# Altium PCB 001-0002_beaglebone_cape_board.PcbDoc
Units mil, origin at the board's own origin, x right, y up, seen from the top; angles counter-clockwise.
Board outline 2155.03 x 2890.03 mil, 2 copper layers (Top Layer, Bottom Layer), stack 42.756 mil thick; 8 components, 7 nets, 117 pads, 0 vias.
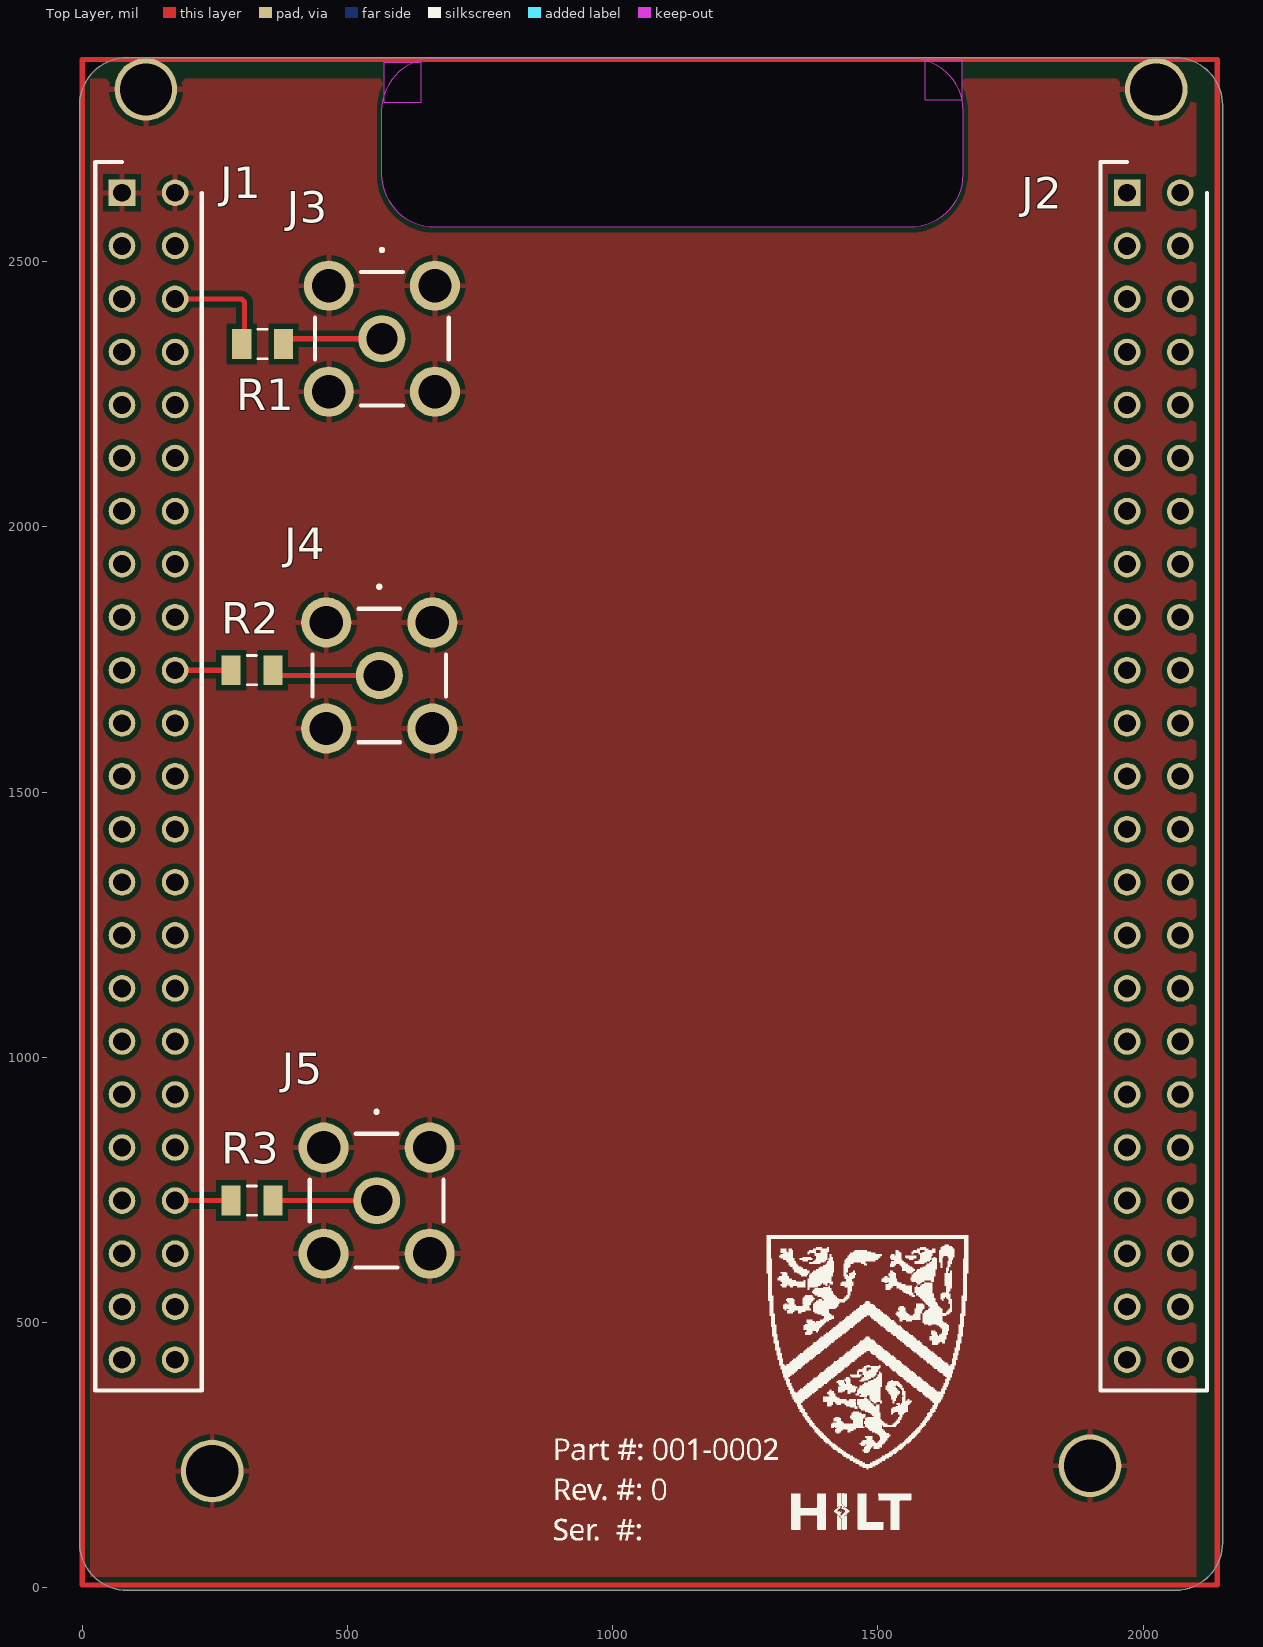
[diagram p0: Top Layer view]
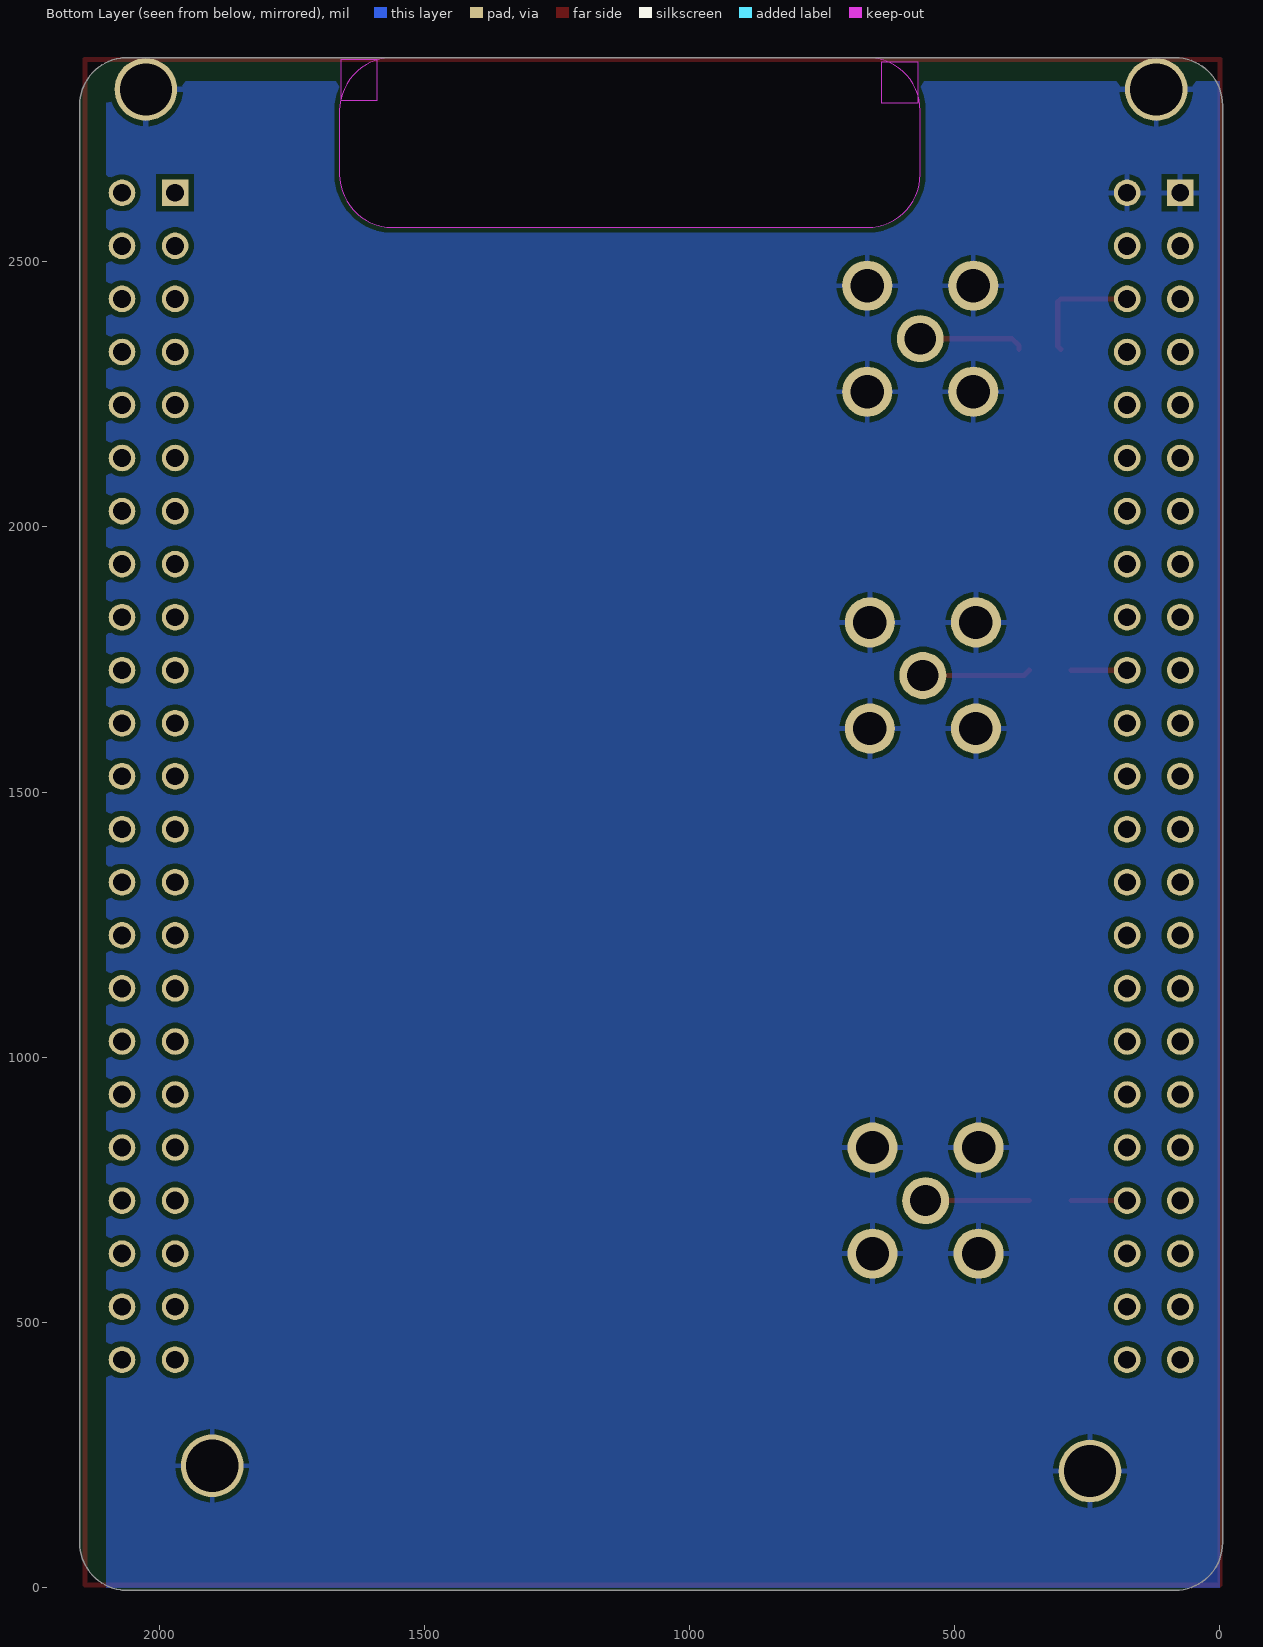
[diagram p1: Bottom Layer view, seen from below]
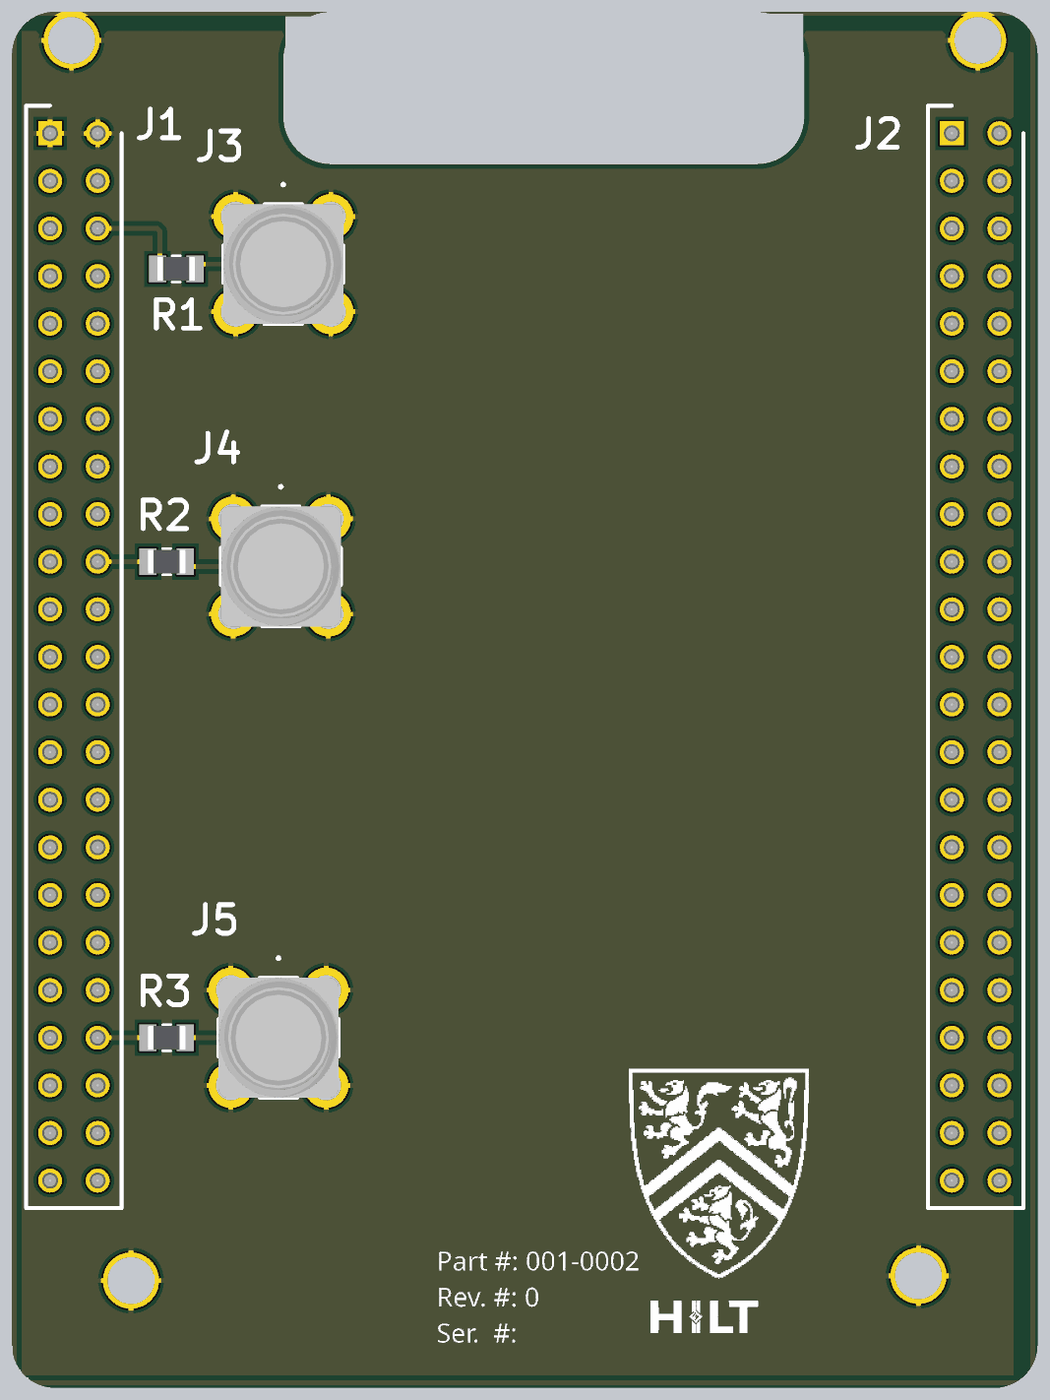
[diagram p2: 3D render of the assembled board from above, using the file's embedded part models]

## Layer stack, top to bottom
Top Solder: solder mask 0.4, Solder Resist, Dk 3.5
Top Layer: signal copper 1.378
Dielectric 1: dielectric 40, FR-4, Dk 4.8
Bottom Layer: signal copper 1.378
Bottom Solder: solder mask 0.4, Solder Resist, Dk 3.5

## Board outline
-5.02,85 ccw(c85,85) 85,-5.02 2070,-5.02 2072.91,-4.08 ccw(c2060,85) 2150.01,85 2150.01,90 2150.01,2794.95 2150.02,2795 ccw(c2060,2795) 2072.91,2884.08 2070,2885.01 85,2885.01 ccw(c85,2795) -5.01,2795
cut-out: 1589.17,2804.51 1589.17,2881.16 1658.08,2881.16 1658.08,2804.51
cut-out: 569.17,2799.51 569.17,2876.16 638.08,2876.16 638.08,2799.51
cut-out: 565,2665 565,2785 cw(c665,2785) 665,2885 1560,2885 cw(c1560,2785) 1660,2785 1660,2665 cw(c1560,2665) 1560,2565 665,2565 cw(c665,2665)

## Design rules (kind name [scope] priority, off if disabled: settings)
Clearance [All] p1: gap=10 ignorepadtopadclearanceinfootprint=FALSE except(5: Arc-Arc Arc-Track Track-Track)
PolygonConnect [All] p1: connectstyle=Relief reliefconductorwidth=10 reliefentries=4 polygonreliefangle="90 Angle" airgapwidth=10
RoutingVias [All] p1: holewidth=28 width=50 viastyle="Through Hole" minholewidth=28 minwidth=50 maxholewidth=28 maxwidth=50
SolderMaskExpansion [All] p1: expansion=4 istentingtop=FALSE
SupplyNets "Schematic Supply Nets" [InNet('GND')] p1: voltage=0.000
Width [All] p1: maxlimit=10 minlimit=10 preferedwidth=10
30 further rules are at their usual default settings.

## Components (designator, comment, footprint, x,y, rotation, side; value= is the part's Value field where it differs from the comment)
J1 "2076" HDRV46W64P254_2X23_5842X500X874P 75,2630 r270 top locked
J2 "2076" HDRV46W64P254_2X23_5842X500X874P 1970,2630 r270 top locked
J3 "5-1814832-2" 5-1814832-2 565,2355 r270 top
J4 "5-1814832-2" 5-1814832-2 560,1720 r270 top
J5 "5-1814832-2" 5-1814832-2 555,730 r270 top
R1 "RCS08050000Z0EA" RESC2012X50N 340,2345 r0 top
R2 "RCS08050000Z0EA" RESC2012X50N 320,1730 r0 top
R3 "RCS08050000Z0EA" RESC2012X50N 320,730 r0 top

## Footprints (in the part's own frame and the unit in brackets; to place one, negate y for a bottom-side part, rotate by r counter-clockwise, add the part's x,y. Pads: shape width x height; smd on the part's side, far side on the other; paste and mask are expansions set on the pad)
5-1814832-2 [mm] "SMA STR PCB SKT GZD"
  round 2.25 hole 1.5: 1(0,0)
  round 2.4 hole 1.6: 2(-2.54,-2.54) 3(2.54,-2.54) 4(2.54,2.54) 5(-2.54,2.54)
  silkscreen extent -4.3,-3.2 3.2,3.2, body extent -3.2,-3.2 3.2,3.2, height 8.89
HDRV46W64P254_2X23_5842X500X874P [mm]
  rect 1.275x1.275 / inner round 1.275 / far side rect 1.275x1.275 hole 0.85: 1(0,0)
  round 1.275 hole 0.85: 2(0,2.54) 3(2.54,0) 4(2.54,2.54) 5(5.08,0) 6(5.08,2.54) 7(7.62,0) 8(7.62,2.54) 9(10.16,0) 10(10.16,2.54) 11(12.7,0) 12(12.7,2.54) 13(15.24,0) 14(15.24,2.54) 15(17.78,0) 16(17.78,2.54) 17(20.32,0) 18(20.32,2.54) 19(22.86,0) 20(22.86,2.54) 21(25.4,0) 22(25.4,2.54) 23(27.94,0) 24(27.94,2.54) 25(30.48,0) 26(30.48,2.54) 27(33.02,0) 28(33.02,2.54) 29(35.56,0) 30(35.56,2.54) 31(38.1,0) 32(38.1,2.54) 33(40.64,0) 34(40.64,2.54) 35(43.18,0) 36(43.18,2.54) 37(45.72,0) 38(45.72,2.54) 39(48.26,0) 40(48.26,2.54) 41(50.8,0) 42(50.8,2.54) 43(53.34,0) 44(53.34,2.54) 45(55.88,0) 46(55.88,2.54)
  silkscreen extent -1.47,-1.28 57.35,3.82, body extent -1.27,-1.23 57.15,3.77, height 8.74
RESC2012X50N [mm]
  rect 0.92x1.42 smd: 1(-1,0) 2(1,0)
  silkscreen extent -0.22,-0.7 0.22,0.7, body extent -1,-0.63 1,0.63, height 0.5

## Part data
J1 J2: "Adafruit Accessories 2x23 Male Headers for BeagleBone Black - Two Pack", Manufacturer_Name=Adafruit, Mouser Part Number=485-2076, Datasheet Link=https://cdn-shop.adafruit.com/datasheets/16188.pdf, Geometry.Height=8.74mm, Manufacturer_Part_Number=2076, Mouser Price/Stock=https://www.mouser.co.uk/ProductDetail/Adafruit/2076?qs=GURawfaeGuBAvD7rncVFUg%3D%3D
J3 J4 J5: "SMA Connector Jack, Female Socket 50 Ohms Through Hole Solder", Manufacturer_Name="TE Connectivity", Mouser Part Number=571-5-1814832-2, Datasheet Link=https://www.te.com/commerce/DocumentDelivery/DDEController?Action=srchrtrv&DocNm=1-1773725-8_RF_COAX_QRG&DocType=Data%20Sheet&DocLang=English&PartCntxt=5-1814832-2&DocFormat=pdf, Geometry.Height=9.5mm, Manufacturer_Part_Number=5-1814832-2, Mouser Price/Stock=https://www.mouser.co.uk/ProductDetail/TE-Connectivity/5-1814832-2?qs=Cb2nCFKsA8rPOrkEMAAQ4A%3D%3D
R1 R2 R3: "RES SMD 0 OHM JUMPER 1/2W 0805", Package="2012 Vishay", Check_prices=https://www.snapeda.com/parts/RCS08050000Z0EA/Vishay%20Dale/view-part/922781/?ref=eda, Digi-Key_Part_Number=541-2827-1-ND, MF="Vishay Dale", MP=RCS08050000Z0EA, Purchase-URL=https://pricing.snapeda.com/search/part/RCS08050000Z0EA/?ref=eda, SnapEDA_Link=https://www.snapeda.com/parts/RCS08050000Z0EA/Vishay%20Dale/view-part/922781/?ref=snap

## Free pads (board coordinates)
  round 118.11 hole 98.43: 1(120,2825) 1(245,220) 1(1900,230) 1(2025,2825)

## Nets (pads, with @x,y where several pads share a name; then routed paths per layer and width w, separated by ;. In a path a pad name is that pad's centre, name@x,y a point inside that pad or via, vN(x,y) a via of type N, cw(c..) or ccw(c..) an arc to the next point about the centre after c; other vN are vias at no path point)
GND: J1.1 J1.2 J3.2 J3.3 J3.4 J3.5 J4.2 J4.3 J4.4 J4.5 J5.2 J5.3 J5.4 J5.5 pad.1
NetJ1_6: J1.6 R1.1 | length 224.9
  Top Layer w10: J1.6 300.07,2430 305.92,2424.14 305.92,2340.92 R1.1@300,2335
NetJ1_20: J1.20 R2.1 | length 105.6
  Top Layer w10: J1.20 R2.1
NetJ1_40: J1.40 R3.1 | length 105.6
  Top Layer w10: J1.40 R3.1
NetJ3_1: J3.1 R1.2 | length 198.6
  Top Layer w10: R1.2@378.74,2335 378.74,2341.89 391.85,2355 J3.1
NetJ4_1: J4.1 R2.2 | length 204.8
  Top Layer w10: R2.2 369.37,1720 J4.1
NetJ5_1: J5.1 R3.2 | length 195.6
  Top Layer w10: R3.2 J5.1
pads on no net: J1.3 J1.4 J1.5 J1.7 J1.8 J1.9 J1.10 J1.11 J1.12 J1.13 J1.14 J1.15 J1.16 J1.17 J1.18 J1.19 J1.21 J1.22 J1.23 J1.24 J1.25 J1.26 J1.27 J1.28 J1.29 J1.30 J1.31 J1.32 J1.33 J1.34 J1.35 J1.36 J1.37 J1.38 J1.39 J1.41 J1.42 J1.43 J1.44 J1.45 J1.46 J2.1 J2.2 J2.3 J2.4 J2.5 J2.6 J2.7 J2.8 J2.9 J2.10 J2.11 J2.12 J2.13 J2.14 J2.15 J2.16 J2.17 J2.18 J2.19 J2.20 J2.21 J2.22 J2.23 J2.24 J2.25 J2.26 J2.27 J2.28 J2.29 J2.30 J2.31 J2.32 J2.33 J2.34 J2.35 J2.36 J2.37 J2.38 J2.39 J2.40 J2.41 J2.42 J2.43 J2.44 J2.45 J2.46
copper on no net: | length 20065.6
  Top Layer w10: 0,5 2140,5 ; 0,5 0,2881.39 ; 0,5 2140,5 ; 0,5 0,2881.39 ; 0,2881.39 2140,2881.39 ; 0,2881.39 2140,2881.39 ; 2140,5 2140,2881.39 ; 2140,5 2140,2881.39

## Polygon pours and split planes (outlines as drawn)
GND on Top Layer "GND_L01_P000" (solid, pour order 0): 0,5 2100,5 2100,2845 0,2845
GND on Bottom Layer "GND_L02_P002" (solid, pour order 2): 0,0 2100,0 2100,2840 0,2840

## Other copper
Top Layer:
  text "TODO: / - RF simulation for TLs" at 65,3035 h60

## Silkscreen, mask and mechanical layers (free items; w line width, h text height)
Top Overlay:
  drawing of 58 lines, arcs and shapes, not listed
Mechanical 1:
  lines w10: 0,3400 2140,3400 ; 774.98,2880 85,2880 ccw(c85,2795) 0,2795 0,85 ccw(c85,85) 85,0 2070,0 ; 1380,2880 2069.99,2880 ; 2020,-2645 ccw(c2105,-2645) 2105,-2730 ; 2060,0 ccw(c2060,85) 2145,85 ; 2060,2880 cw(c2060,2795) 2145,2795 2145,90 ; 565,2665 ccw(c665,2665) 665,2565 1560,2565 ccw(c1560,2665) 1660,2665 1660,2785 ccw(c1560,2785) 1560,2885 665,2885 ccw(c665,2785) 565,2785 565,2665 ; 569.17,2799.51 638.08,2799.51 638.08,2876.16 569.17,2876.16 569.17,2799.51 ; 1589.17,2804.51 1658.08,2804.51 1658.08,2881.16 1589.17,2881.16 1589.17,2804.51
Drill Drawing:
  drawing of 225 lines, arcs and shapes, not listed
  text "NOTES: UNLESS OTHERWISE SPECIFIED" at 3064,6309.49 h80
  text "1. BOARD AND BONDING MATERIALS SHALL CONFORM TO IPC-4101 (CURRENT REVISION).  THE MATERIAL SHALL BE FR-4 WITH UL 94V-0 RATING" at 3364,6109.49 h80
  text "AT A TEMPERATURE RATING OF 130 DEGREES C OR GREATER.  FINAL BOARD THICKNESS AND TOLERANCES ARE SPECIFIED" at 3514,5959.49 h80
  text "WITH THE LAYER STACK INFORMATION." at 3514,5824.49 h80
  text "2. THE FINISHED BOARD SHALL MEET THE REQUIREMENTS OF IPC-A-600.  \"WARP AND TWIST\" SHALL NOT" at 3359,5644.49 h80
  text "EXCEED 0.007 INCH PER INCH WITH A MAX OF 0.09 INCH MEASURED IN ACCORDANCE WITH" at 3509,5494.49 h80
  text "IPC-TM-650, METHOD 2.4.2.2." at 3509,5359.49 h80
  text "3. SOLDER MASK SHALL BE PHOTO-IMAGED LIQUID POLYMER BOTH SIDES OF BOARD IN ACCORDANCE" at 3364,5174.49 h80
  text "WITH IPC-SM-840C, USING BLACK SOLDER MASK TAIYO \"PSR-4000\" OR EQUIVALENT." at 3514,5024.49 h80
  text "EXPOSED TRACES ARE UNACCEPTABLE." at 3514,4889.49 h80
  text "4. ALL EXPOSED CONDUCTIVE PATTERN AREAS NOT COVERED WITH SOLDER MASK OR OTHER PLATING" at 3364,4724.49 h80
  text "SHALL BE ELECTROLESS NICKEL IMMERSION GOLD (ENIG)." at 3514,4574.49 h80
  text "5. SILKSCREEN SHALL BE WHITE, PERMANENT, ORGANIC, NON-CONDUCTIVE INK, EQUIVALENT TO" at 3374,4389.49 h80
  text "W0R-N0W-CAT-L-INK 50-10R.  THERE SHALL BE NO SILKSCREEN ON ANY SOLDERABLE COMPONENT." at 3524,4239.49 h80
  text "6. FABRICATE PCB IN ACCORDANCE WITH IPC-A-600, CLASS 2; USING CUSTOMER SUPPLIED" at 3374,4054.49 h80
  text "DATA FILES." at 3524,3904.49 h80
  text "7. PCB BOARD SHALL BE ELECTRICALLY TESTED FOR SHORTS AND OPENS USING CUSTOMER" at 3369,3749.49 h80
  text "SUPPLIED IPC-D-356 NETLIST." at 3519,3599.49 h80
  text "8. HOLE SIZES REFER TO FINISHED HOLE SIZES." at 3379,3414.49 h80
  text "9. FINISHED HOLE SIZE TOLERANCE SHALL BE +/-0.005 INCH." at 3384,3234.49 h80
  text "10. IF THIEVING IS TO BE ADDED IT SHALL HAVE A CLEARANCE GREATER THAN 1.200 INCH FROM PCB" at 3379,3084.49 h80
  text "FEATURES.  SOME EXAMPLES ARE BOARD EDGE, COPPER, HOLES, ETC." at 3529,2934.49 h80
  text "11. FIDUCIALS MAY BE MODIFIED, WITH MOVING THE ORIGIN OF THE FIDUCIAL, WITHIN THE 0.080" at 3379,2749.49 h80
  text "INCH DIAMETER SOLDER MASK RELIEF AS DEFINED IN THE GERBER DATA." at 3529,2599.49 h80
  text "Layer" at 3400.58,1985 h60
  text "Name" at 3810.49,1985 h60
  text "Material" at 4740.23,1985 h60
  text "Thickness" at 5600,1985 h60
  text "Constant" at 6249.84,1985 h60
  text "Board Layer Stack" at 6819.7,1985 h60
  text "Top Overlay" at 3810.49,1865 h60
  text "Top Solder" at 3810.49,1745 h60
  text "Solder Resist" at 4740.23,1745 h60
  text "0.40mil" at 5600,1745 h60
  text "3.5" at 6249.84,1745 h60
  text "1" at 3400.58,1625 h60
  text "Top Layer" at 3810.49,1625 h60
  text "1.38mil" at 5600,1625 h60
  text "Dielectric 1" at 3810.49,1505 h60
  text "FR-4" at 4740.23,1505 h60
  text "40.00mil" at 5600,1505 h60
  text "4.8" at 6249.84,1505 h60
  text "2" at 3400.58,1385 h60
  text "Bottom Layer" at 3810.49,1385 h60
  text "1.38mil" at 5600,1385 h60
  text "Bottom Solder" at 3810.49,1265 h60
  text "Solder Resist" at 4740.23,1265 h60
  text "0.40mil" at 5600,1265 h60
  text "3.5" at 6249.84,1265 h60
  text "Bottom Overlay" at 3810.49,1145 h60
  text "Final board thickness shall be 0.062 inches +/- 10%" at 3410,950 h60
  text "Symbol" at 3427.5,712.5 h72
  text "Count" at 3933.38,712.5 h72
  text "Hole Size" at 4503.23,712.5 h72
  text "Plated" at 5602.91,712.5 h72
  text "Hole Type" at 6108.78,712.5 h72
  text "Drill Layer Pair" at 6842.58,712.5 h72
  text "Via/Pad" at 8342.13,712.5 h72
  text "Pad Shape" at 8931.98,712.5 h72
  text "Template" at 9677.78,712.5 h72
  text "3" at 3933.38,562.5 h60
  text "59.06mil (1.500mm)" at 4503.23,562.5 h60
  text "PTH" at 5602.91,562.5 h60
  text "Round" at 6108.78,562.5 h60
  text "Top Layer - Bottom Layer" at 6842.58,562.5 h60
  text "Pad" at 8342.13,562.5 h60
  text "Rounded" at 8931.98,562.5 h60
  text "c225h150" at 9677.78,562.5 h60
  text "4" at 3933.38,412.5 h60
  text "98.43mil (2.500mm)" at 4503.23,412.5 h60
  text "PTH" at 5602.91,412.5 h60
  text "Round" at 6108.78,412.5 h60
  text "Top Layer - Bottom Layer" at 6842.58,412.5 h60
  text "Pad" at 8342.13,412.5 h60
  text "Rounded" at 8931.98,412.5 h60
  text "c300h250" at 9677.78,412.5 h60
  text "12" at 3933.38,262.5 h60
  text "62.99mil (1.600mm)" at 4503.23,262.5 h60
  text "PTH" at 5602.91,262.5 h60
  text "Round" at 6108.78,262.5 h60
  text "Top Layer - Bottom Layer" at 6842.58,262.5 h60
  text "Pad" at 8342.13,262.5 h60
  text "Rounded" at 8931.98,262.5 h60
  text "c240h160" at 9677.78,262.5 h60
  text "92" at 3933.38,112.5 h60
  text "33.47mil (0.850mm)" at 4503.23,112.5 h60
  text "PTH" at 5602.91,112.5 h60
  text "Round" at 6108.78,112.5 h60
  text "Top Layer - Bottom Layer" at 6842.58,112.5 h60
  text "Pad" at 8342.13,112.5 h60
  text "Rounded" at 8931.98,112.5 h60
  text "(Mixed)" at 9677.78,112.5 h60
  text "111 Total" at 3933.38,-37.5 h60